# Altium PCB Blinky_Stick_PCB.PcbDoc
Units mm, origin at the board's own origin, x right, y up, seen from the top; angles counter-clockwise.
Board outline 50 x 15.4 mm, 2 copper layers (L1, L2), stack 1.57 mm thick; 20 components, 10 nets, 50 pads, 12 vias.
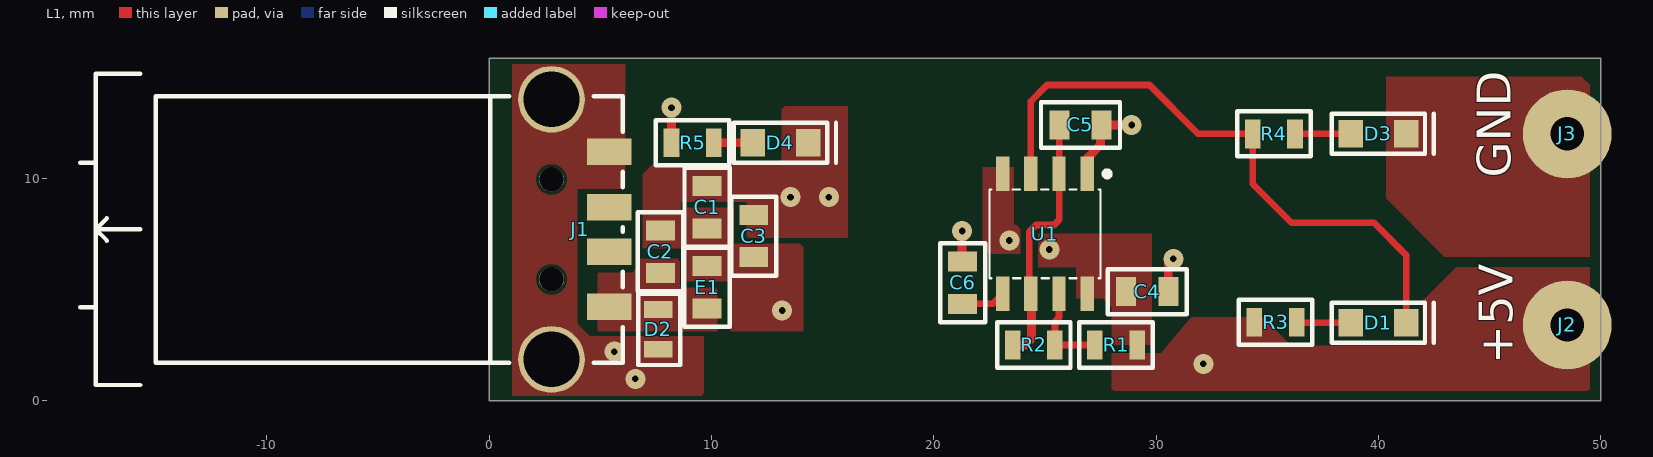
[diagram p0: L1 view]
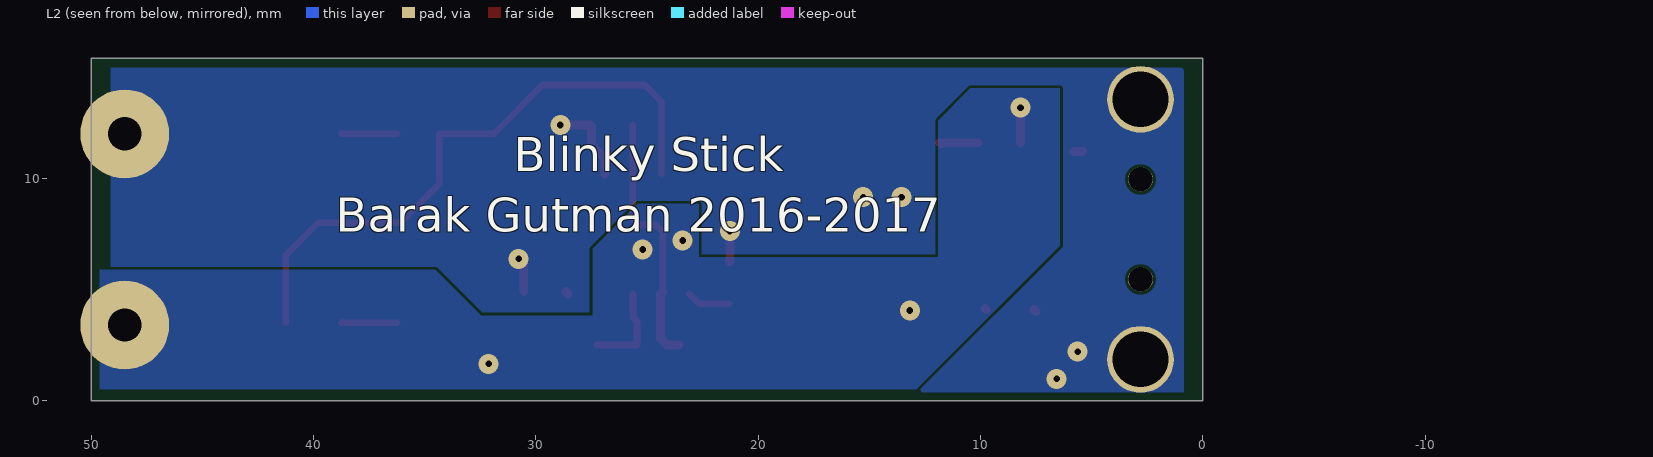
[diagram p1: L2 view, seen from below]
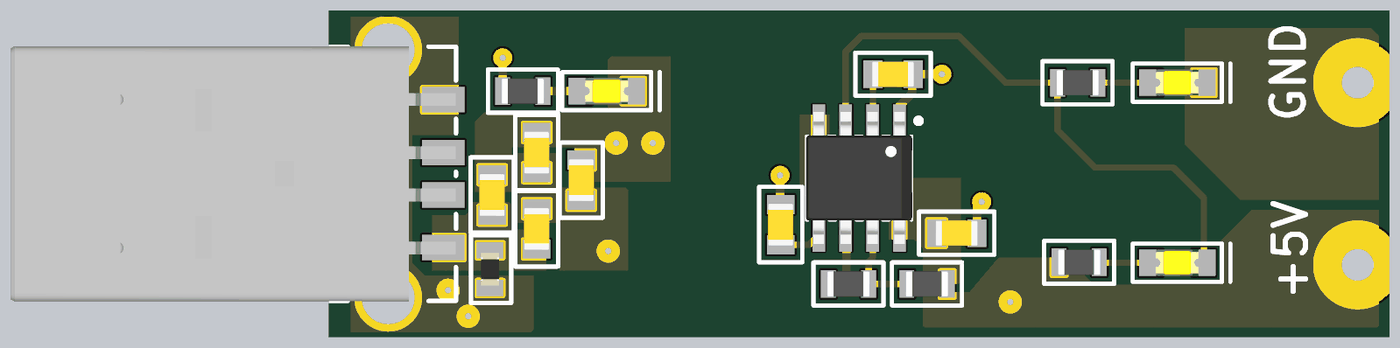
[diagram p2: 3D render of the assembled board from above, using the file's embedded part models]

## Layer stack, top to bottom
Top Solder: solder mask 0.01, Solder Resist, Dk 3.5
L1: signal copper 0.035
Dielectric 1: dielectric 1.5, FR-4, Dk 4.8
L2: signal copper 0.035
Bottom Solder: solder mask 0.01, Solder Resist, Dk 3.5

## Board outline
0,0 0,15.4 50,15.4 50,0 0,0

## Design rules (kind name [scope] priority, off if disabled: settings)
Clearance [All] p1: gap=0.13
ComponentClearance [All] p1: gap=0.13 collisioncheckmode=3 verticalgap=0.13 showdistances=FALSE
HoleSize [All] p1: absolutevalues=TRUE maxlimit=10 minlimit=0.3 maxpercent=80.000 minpercent=20.000
HoleToHoleClearance [All] p1: gap=0.3 allowstackedmicrovias=TRUE
MinimumAnnularRing [All] p1: minimumring=0.15
MinimumSolderMaskSliver [All] p1: minsoldermaskwidth=0.1
PolygonConnect [All] p1: connectstyle=Direct reliefconductorwidth=0.254 reliefentries=4 polygonreliefangle="90 Angle" airgapwidth=0.254
RoutingVias [All] p1: holewidth=0.3 width=0.9 viastyle="Through Hole" minholewidth=0.3 minwidth=0.9 maxholewidth=0.3 maxwidth=0.9
SilkToSilkClearance [All] p1: silktosilkclearance=0.1
SilkToSolderMaskClearance [IsPad] p1: minsilkscreentomaskgap=0.1 clearancetoexposedcopper=TRUE
SolderMaskExpansion [All] p1: expansion=0.1
Width "Width POWERS" [InNet('+*') or InNet('GND')] p1: maxlimit=4 minlimit=0.4 preferedwidth=0.4
Width [All] p2: maxlimit=0.5 minlimit=0.13 preferedwidth=0.13
24 further rules are at their usual default settings.

## Components (designator, comment, footprint, x,y, rotation, side; value= is the part's Value field where it differs from the comment)
C1 "0.1u / 50V" C0805 9.8,8.7 r270 top
C2 "0.01u / 50V" C0805 7.7,6.7 r270 top
C3 "10u / 16V" C0805 11.9,7.4 r270 top
C4 "0.01u / 50V" C0805 29.6,4.9 r180 top
C5 "10u / 16V" C0805 26.6,12.4 r180 top
C6 "0.01u / 50V" C0805 21.3,5.3 r270 top
D1 "Yellow" LED0805 40,3.5 r0 top
D2 "PGB1010603NRHF" DIODE_0603 7.6,3.2 r90 top
D3 "Red" LED0805 40,12 r0 top
D4 "Green" LED0805 13.1,11.6 r0 top
E1 "BLM21PG221SN1D" C0805 9.8,5.1 r90 top
J1 "0480372200" 0480372200 4.1,7.7 r270 top locked
J2 "4MMx1.5MM" PAD_WITH_HOLE_4MMX1.5MM 48.5,3.4 r0 top locked
J3 "4MMx1.5MM" PAD_WITH_HOLE_4MMX1.5MM 48.5,12 r0 top locked
R1 "200K" R0805 28.2,2.5 r0 top
R2 "200K" R0805 24.5,2.5 r0 top
R3 "150" R0805 35.375,3.525 r0 top
R4 "66R5" R0805 35.3,12 r0 top
R5 "150" R0805 9.15,11.6 r0 top
U1 "NE555DR" SOIC-8_D_R-PDSO-G8 25,7.5 r270 top locked

## Footprints (in the part's own frame and the unit in brackets; to place one, negate y for a bottom-side part, rotate by r counter-clockwise, add the part's x,y. Pads: shape width x height; smd on the part's side, far side on the other; paste and mask are expansions set on the pad)
0480372200 [mm]
  rect 1.2x2 smd: 1(3.48,1.3) 2(1,1.3) 3(-1,1.3) 4(-3.5,1.3)
  round 3 hole 2.5: 5(-5.85,-1.3) 8(5.85,-1.3)
  round 1.1 hole 1.1 unplated: 6(-2.25,-1.3) 7(2.25,-1.3)
  silkscreen extent -7,-22.5 7,1.9, body extent -6.02,-19.07 6.03,1.88, height 2.11
C0805 [mm]
  rect 0.9x1.3 smd: 1(-0.95,0) 2(0.95,0)
  silkscreen extent -1.78,-1.02 1.78,1.02, body extent -1,-0.6 1,0.6, height 1.28
DIODE_0603 [mm]
  rect 0.76x1.27 smd: 1(-0.89,0) 2(0.89,0)
  silkscreen extent -1.6,-1 1.6,0.9, body extent -0.78,-0.43 0.77,0.43, height 0.46
LED0805 [mm]
  rect 1.1x1.25 smd: 1(-1.25,0) 2(1.25,0)
  silkscreen extent -2.1,-0.9 2.5,0.9, body extent -1.01,-0.63 1.01,0.62, height 1.1
PAD_WITH_HOLE_4MMX1.5MM [mm] "Pad with hole 4mm x 1.5mm"
  round 4 hole 1.5: 1(0,0)
R0805 [mm]
  rect 0.7x1.3 smd: 1(-0.95,0) 2(0.95,0)
  silkscreen extent -1.65,-1.02 1.65,1.02, body extent -1,-0.6 1,0.6, height 0.71
SOIC-8_D_R-PDSO-G8 [mm]
  rect 1.55x0.6 smd mask+0.07: 1(-2.7,1.905) 2(-2.7,0.635) 3(-2.7,-0.635) 4(-2.7,-1.905) 5(2.7,-1.905) 6(2.7,-0.635) 7(2.7,0.635) 8(2.7,1.905)
  silkscreen extent -2.8,-2.5 2,2.9, body extent -3.11,-2.5 3.11,2.5, height 1.75

## Part data
C1: library part C2012X7R1H104K085AA, "CAP CER 0.1UF 50V X7R 0805"
C2 C4 C6: library part C2012C0G1H103K060AA, "CAP CER 10000PF 50V C0G 0805"
C3 C5: library part C2012X5R1C106K085AC, "CAP CER 10UF 16V X5R 0805"
D1: library part LTST-C171KSKT, "LED YELLOW CLEAR 0805 SMD"
D2: "TVS DIODE 24VWM 150VC 0603"
D3: library part LTST-C171KRKT, "LED RED CLEAR 0805 SMD"
D4: library part LTST-C171GKT, "LED GREEN CLEAR 0805 SMD"
E1: "FERRITE BEAD 220 OHM 0805 1LN"
J1: "CONN PLUG USB A 4POS SMD R/A"
J2 J3: library part PAD_WITH_HOLE_4MMx1.5MM, "Pad with hole 4mm x 1.5mm"
R1 R2: library part RC0805FR-07200KL, "RES SMD 200K OHM 1% 1/8W 0805"
R3 R5: library part RC0805FR-07150RL, "RES SMD 150 OHM 1% 1/8W 0805"
R4: library part RC0805FR-0766R5L, "RES SMD 66.5 OHM 1% 1/8W 0805"
U1: "IC OSC SGL TIMER 100KHZ 8-SOIC"

## Via types
v1: diameter 0.9, hole 0.3, L1 to L2, 12 vias

## Nets (pads, with @x,y where several pads share a name; then routed paths per layer and width w, separated by ;. In a path a pad name is that pad's centre, name@x,y a point inside that pad or via, vN(x,y) a via of type N, cw(c..) or ccw(c..) an arc to the next point about the centre after c; other vN are vias at no path point)
+5V_SYS: C1.2 C3.2 C4.2 E1.2 J2.1 R1.2 R3.1 R5.1 U1.4 U1.8 | length 2
  L1 w0.4: R5.1 v1(8.2,13.175) ; C4.2@28.55,4.8 C4.2
  L2 w0.4: v1@12.925,4.05 v1(13.175,4.05)
  other v1: 32.125,1.65 25.2,6.8 23.4,7.2
+5V_USB_RAW: C2.2 D2.2 E1.1 J1.1 | length 0.2
  L1 w0.4: D2.2@7.51,4 D2.2 ; E1.1@9.74,4.09 E1.1
GND: C1.1 C2.1 C3.1 C4.1 C5.1 C6.1 D2.1 D3.2 D4.2 J1.4 J1.5 J1.8 J3.1 U1.1 | length 7.4
  L1 w0.4: J1.5 J1.5@2.95,13.4 ; J1.4 J1.4@5.8,11.2 ; v1(21.275,7.625) 21.275,6.275 C6.1 ; U1.1 26.905,10.905 27.5,11.5 27.5,12.35 C5.1 v1(28.9,12.4) ; C4.1 30.55,6.15 v1(30.775,6.375)
  other v1: 6.575,0.975 5.625,2.2 13.55,9.15 15.275,9.15
NetC5_2: C5.2 R2.1 U1.2 U1.6 | length 11.6
  L1 w0.3: U1.6@24.3,4.865 24.3,7.6 24.6,7.9 25.4,7.9 25.65,8.15 C5.2
  L1 w0.4: R2.1 24.1,2.5 24.4,2.8 24.4,4.765 U1.6 U1.6@24.3,4.865
NetC6_2: C6.2 U1.5 | length 2
  L1 w0.3: C6.2 22.645,4.35 U1.5
NetD1_1: D1.1 R3.2 | length 2.5
  L1 w0.3: R3.2@36.25,3.5 D1.1
NetD1_2: D1.2 R4.1 U1.3 | length 28
  L1 w0.3: U1.3 24.365,13.465 25.1,14.2 29.7,14.2 31.9,12 R4.1 34.35,9.75 36.1,8 39.8,8 41.25,6.55 D1.2
NetD3_1: D3.1 R4.2 | length 2.5
  L1 w0.3: R4.2 D3.1
NetD4_1: D4.1 R5.2 | length 1.9
  L1 w0.3: D4.1@11.75,11.5 D4.1
  L1 w0.4: R5.2 D4.1
NetR1_1: R1.1 R2.2 U1.7 | length 4.2
  L1 w0.3: U1.7 25.635,3.735 25.45,3.55 R2.2 R1.1
pads on no net: J1.2 J1.3 J1.6 J1.7

## Polygon pours and split planes (outlines as drawn)
GND on L1 "GND" (solid, remove dead copper, pour order 57): 49.125,14.575 40.35,14.575 40.35,9.1 42.925,6.525 42.975,6.475 49.5,6.475 49.5,14.2
GND on L1 "GND" (solid, remove dead copper, pour order 53): 8.625,6.85 6.9,6.85 6.9,10.175 7.25,10.525 7.325,10.6 13.15,10.6 13.15,13.1 13.275,13.225 13.3,13.25 16.125,13.25 16.125,7.35 16.1,7.325 11.575,7.325 11.575,8.9 11.5,8.95 11.475,8.95 8.625,8.95
GND on L1 "GND" (solid, remove dead copper, pour order 51): 6.225,2.9 9.65,2.9 9.65,0.325 9.525,0.2 9.5,0.225 1.025,0.225 1.025,15.125 6.125,15.125 6.125,9.675 5.975,9.525 3.95,9.525 3.95,3.475 4.075,3.35 4.525,2.9 6.3,2.9
+5V_SYS on L1 "+5V_SYS" (solid, remove dead copper, pour order 45): 49.5,6 43.5,6 42.15,4.65 42,4.5 42,2.475 36.075,2.475 34.8,3.75 31.6,3.75 31.437,3.587 30.225,2.15 30.2,2.125 28,2.125 28,0.475 28,0.45 28.1,0.45 28.133,0.45 49.5,0.45
+5V_SYS on L1 "+5V_SYS" (solid, remove dead copper, pour order 41): 8.875,5.375 8.875,8.675 10.975,8.675 11,8.65 11,7.05 13.975,7.05 14.125,6.9 14.125,3.125 10.875,3.125 10.875,5.375 8.875,5.375
+5V_SYS on L1 "+5V_SYS" (solid, remove dead copper, pour order 39): 29.8,2.5 29.8,7.5 24.8,7.5 24.7,7.5 24.7,6 26.4,6 26.4,4.6 27.6,4.6 27.8,4.4 28,4.2 28,2.5
+5V_SYS on L1 "+5V_SYS" (solid, remove dead copper, pour order 20): 23.6,10.5 22.2,10.5 22.2,6.9 22.5,6.6 23.9,6.6 23.9,7.7 23.7,7.9 23.6,7.9 23.6,10.5
+5V_USB_RAW on L1 "+5V_USB_RAW" (solid, remove dead copper, pour order 16): 4.875,5.75 4.875,3.125 10.25,3.125 10.25,5.075 8.575,5.075 8.575,6.35 8.55,6.375 6.725,6.375 6.725,6.05 6.425,5.75
+5V_SYS on L2 "+5V_SYS" (solid, remove dead copper, pour order 8): 49.625,5.875 34.519,5.875 32.461,3.818 32.454,3.825 27.45,3.825 27.45,6.825 25.425,8.85 22.675,8.85 22.675,6.475 22.65,6.45 11.9,6.45 11.9,12.6 10.45,14.05 6.425,14.05 6.425,6.975 12.35,1.05 12.9,0.5 49.625,0.5 49.625,5.875
GND on L2 "GND" (solid, remove dead copper, pour order 49): 0.825,15.025 0.875,14.975 49.125,14.975 49.125,0.425 49.15,0.4 49.125,0.375 0.85,0.375 0.85,14.95 0.825,14.975 0.9,14.975

## Silkscreen, mask and mechanical layers (free items; w line width, h text height)
Top Overlay:
  text "GND" at 45.95,10.025 h1.52 r90
  text "+5V" at 46.05,1.625 h1.52 r90
Bottom Overlay:
  text "Blinky Stick" at 31,10.325 h1.52
  text "Barak Gutman 2016-2017" at 39,7.6 h1.52
Mechanical Drawing:
  circle w1.016: c48.5,12 r0.75
  circle w1.016: c48.5,3.4 r0.75
  circle w0.1: c2.8,9.95 r0.658
  circle w0.1: c2.8,5.45 r0.65
  circle w0.1: c2.8,13.55 r1.55
  circle w0.1: c2.8,1.85 r1.563
  lines w1.016: 0,0 50,0 50,15.4 0,15.4 0,0
  text "Mechanical Drawing Blinky Stick" at 4.8,20.3 h1.52
  text "V1.0" at 13.7,17.725 h1.52
  text "Production" at 21.65,17.65 h1.52
  text "Units: mm" at -21.3,-3.8 h1.52
  text "Scale: 1:1" at -21.3,-6.1 h1.52
Manufacturing Notes:
  lines w0.254: -25.4,-42.9 67.1,-42.9 ; -25.4,-42.825 -25.4,-32.825 ; -25.4,-22.9 67.1,-22.9 ; 14.6,-32.9 14.6,-22.9 ; 49.6,-22.9 49.6,-15.4 ; 67.1,-42.825 67.1,-32.825 ; -25.4,-32.9 67.1,-32.9 67.1,-15.4 -25.4,-15.4 -25.4,-32.9
  text "Board info" at -22.5,42 h1.52
  text "Minimum Track: 0.13mm" at -22.5,39.5 h1.52
  text "Minimum Gap: 0.13mm" at -22.5,37 h1.52
  text "Minimum Through Hole VIA: 0.6mm (pad) / 0.3mm (drill). Drilling: L1-L2" at -22.5,34.5 h1.52
  text "Board Finish: ENIG" at -22.5,31.9 h1.52
  text "Board Thickness: 1.6mm" at -22.5,29.3 h1.52
  text "Copper Weight: 1 Ounce" at -22.5,26.8 h1.52
  text "Blinky Stick" at -19.9,-20.4 h3
  text "V1.0" at 52.1,-20.4 h3
  text "Barak Gutman" at -20.4,-27.9 h1.52
  text "https://github.com/barakgut" at 19.3,-29.1 h1.52
  text "2016 - 2017" at -20.4,-30.4 h1.52
  text "Contact:" at -20.4,-37.9 h1.52
  text "barak381@gmail.com" at -5.4,-37.9 h1.52
Board Outline:
  the board outline again, w0.3
ASM Top:
  text "Assembly TOP Blinky Stick" at 5.8,20.05 h1.52
  text "V1.0" at 13.8,17.625 h1.52
  text "Production" at 21.75,17.55 h1.52

## Dimensions
0,0 to 0,15.4 on Mechanical Drawing
0,0 to 50,0 on Mechanical Drawing
2.8,1.85 to 2.8,13.55 on Mechanical Drawing
2.8,5.45 to 2.8,9.95 on Mechanical Drawing
48.5,12 to 48.5,3.4 on Mechanical Drawing